# Altium PCB cpuPCB-v6.PcbDoc (part 1 of 3)
Units mil, origin at the board's own origin, x right, y up, seen from the top; angles counter-clockwise.
Board outline 3900 x 3900 mil, 2 copper layers (Top Layer, Bottom Layer); 139 components, 120 nets, 548 pads, 249 vias.
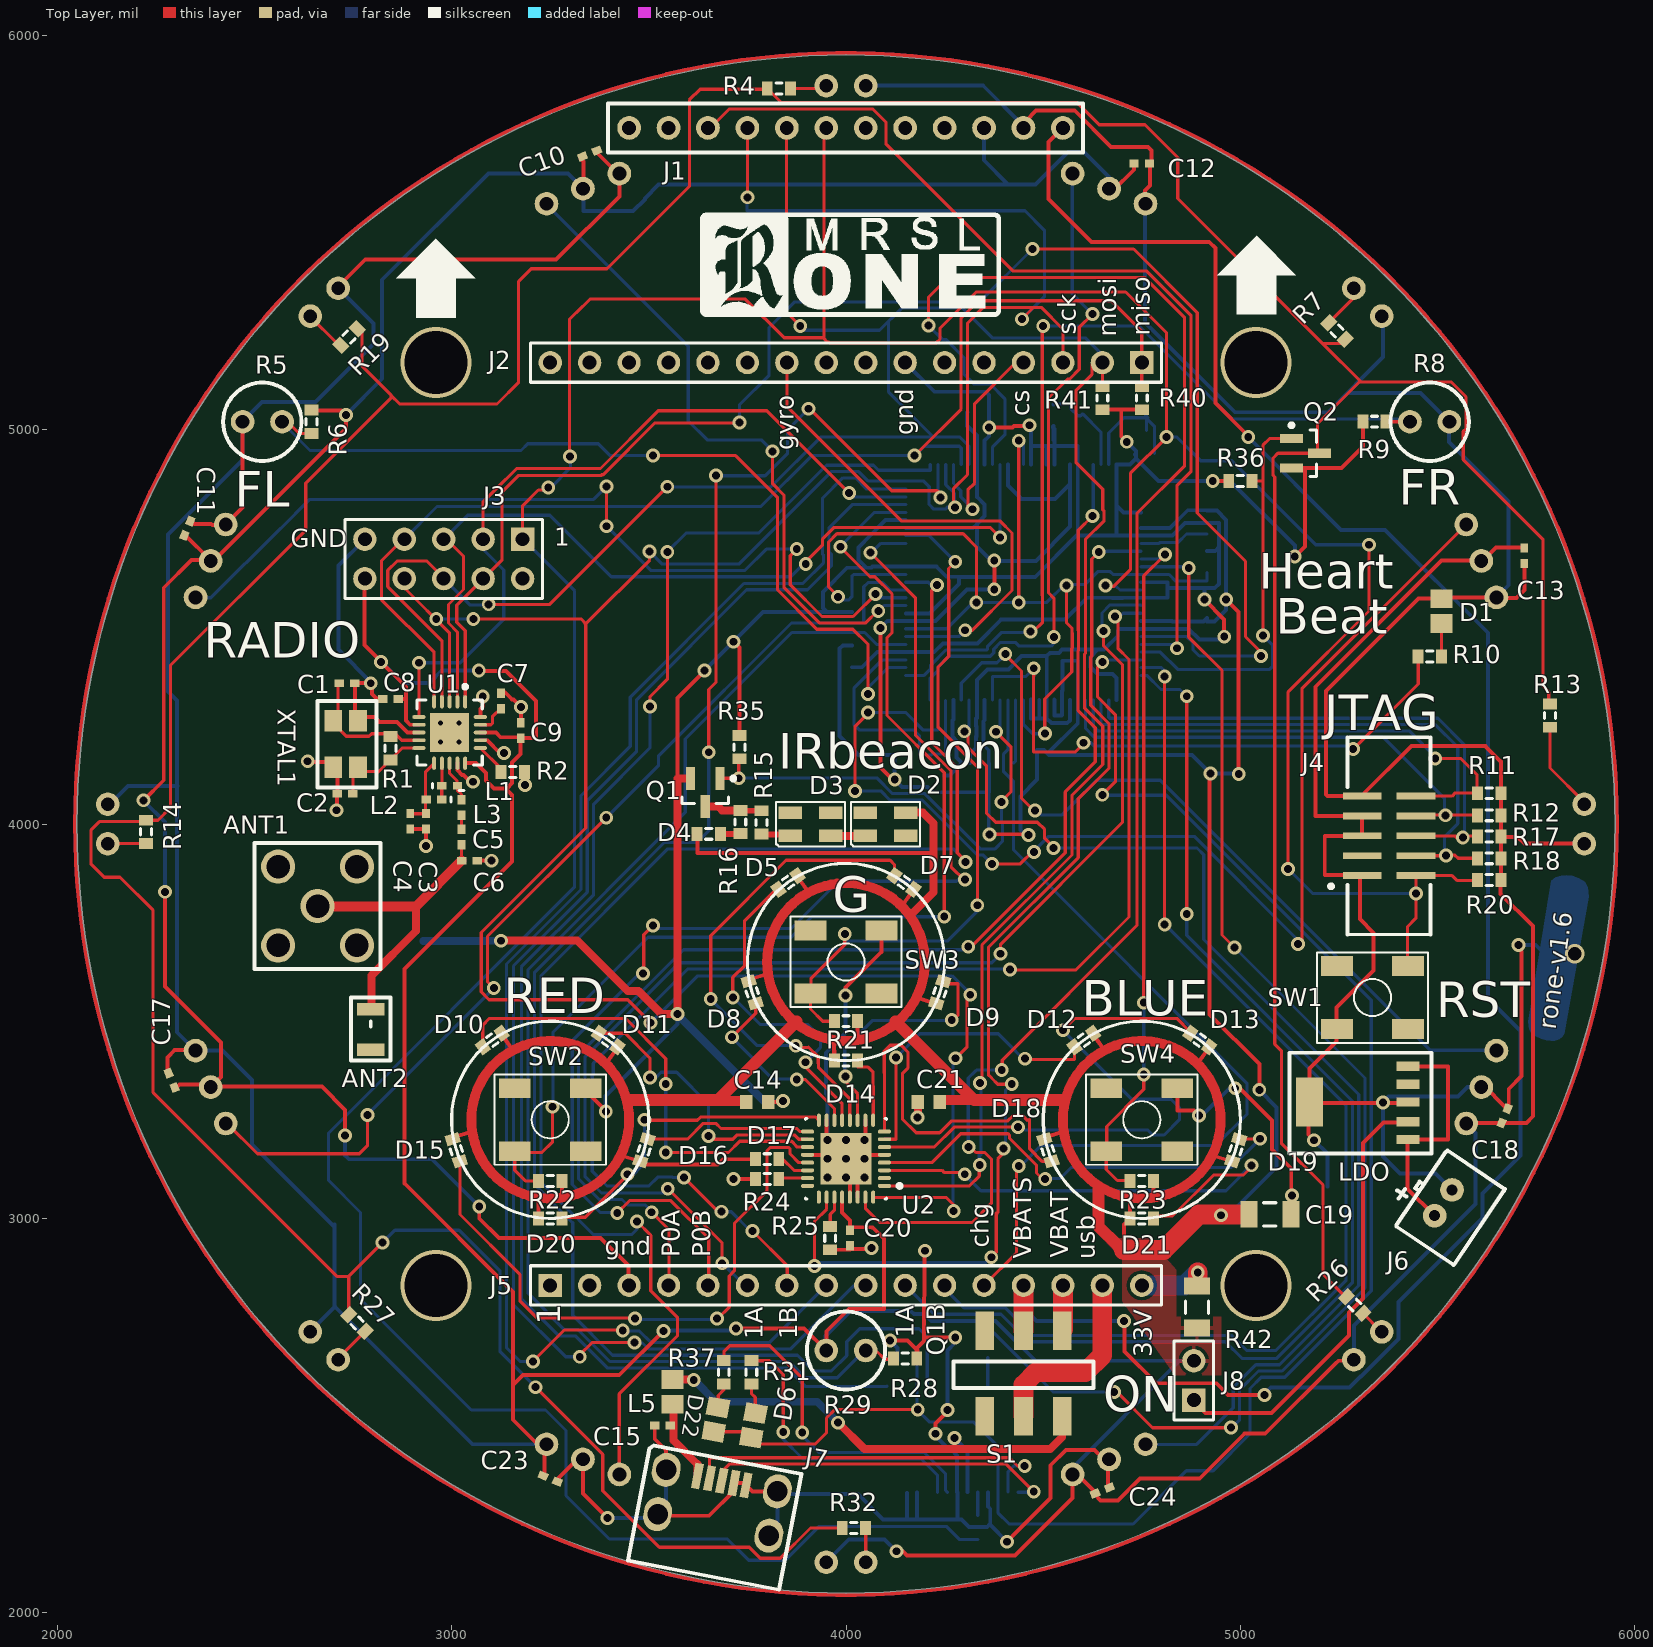
[diagram p0: Top Layer view]
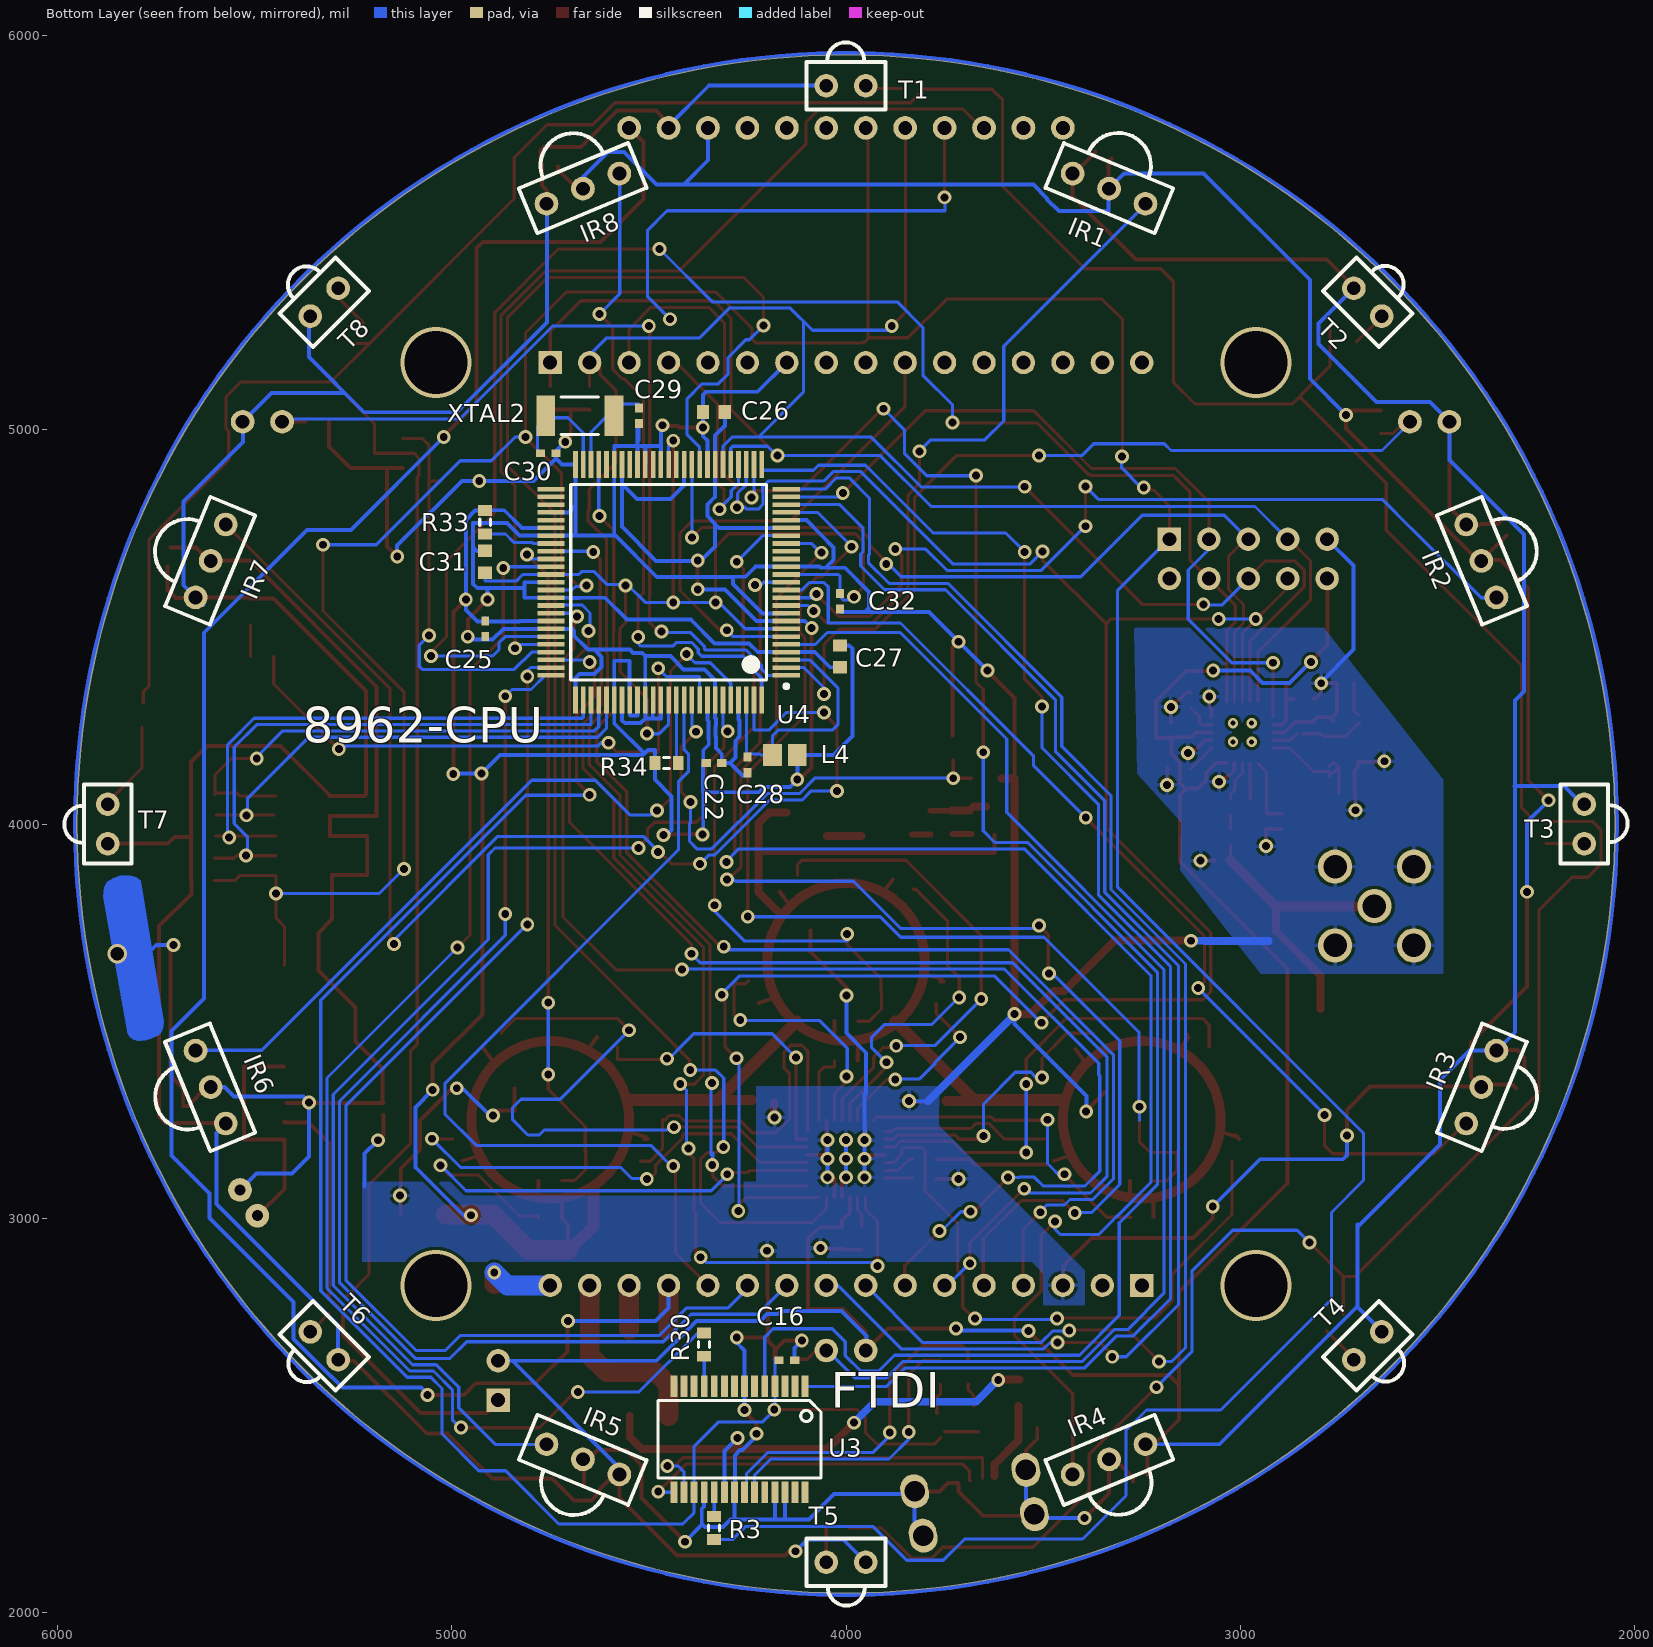
[diagram p1: Bottom Layer view, seen from below]

## Layer stack, top to bottom
Top Layer: signal copper 1.4
Dielectric: dielectric 12.6, FR-4, Dk 4.8
Bottom Layer: signal copper 1.4

## Board outline
4000,2050 cw(c4000,4000) 2050,4000 cw(c4000,4000) 4000,5950 cw(c4000,4000) 5950,4000 cw(c4000,4000)

## Design rules (kind name [scope] priority, off if disabled: settings)
Clearance [All] p1: gap=8
PolygonConnect [All] p1: connectstyle=Relief reliefconductorwidth=10 reliefentries=4 polygonreliefangle="90 Angle"
RoomDefinition USB_Headers [InComponentClass('USB_Headers')] p1: confinementstyle=ConfineIn formatcopy=TRUE lockcomponents=FALSE outline 0,0 2000,0 2000,1000 0,1000
RoomDefinition Radio [InComponentClass('Radio')] p2: confinementstyle=ConfineIn formatcopy=TRUE lockcomponents=FALSE outline 0,0 2000,0 2000,1000 0,1000
RoomDefinition LightSensors_Buttons_LCD [InComponentClass('LightSensors_Buttons_LCD')] p3: confinementstyle=ConfineIn formatcopy=TRUE lockcomponents=FALSE outline 0,0 2000,0 2000,1000 0,1000
RoomDefinition LEDs [InComponentClass('LEDs')] p4: confinementstyle=ConfineIn formatcopy=TRUE lockcomponents=FALSE outline 0,0 2000,0 2000,1000 0,1000
RoomDefinition IRComms [InComponentClass('IRComms')] p5: confinementstyle=ConfineIn formatcopy=TRUE lockcomponents=FALSE outline 0,0 2000,0 2000,1000 0,1000
RoomDefinition CPU [InComponentClass('CPU')] p6: confinementstyle=ConfineIn formatcopy=TRUE lockcomponents=FALSE outline 0,0 2000,0 2000,1000 0,1000
RoutingVias [All] p1: holewidth=20 width=35 viastyle="Through Hole" minholewidth=20 minwidth=35 maxholewidth=20 maxwidth=35
SMDNeckDown [All] p1: percent=400.000
SilkscreenOverComponentPads [All] p1: minsilkscreentomaskgap=10
SolderMaskExpansion [All] p1: expansion=4
Width "Schematic Width Constraint_9" [InNet('5VUSB')] p1: maxlimit=20 minlimit=10 preferedwidth=10 minimp=50.000000 maximp=50.000000 favimp=50.000000
Width "Schematic Width Constraint_5" [InNet('NetC15_2')] p2: maxlimit=20 minlimit=10 preferedwidth=10 minimp=50.000000 maximp=50.000000 favimp=50.000000
Width "Schematic Width Constraint_8" [InNet('GND')] p3: maxlimit=20 minlimit=10 preferedwidth=10 minimp=50.000000 maximp=50.000000 favimp=50.000000
Width "Schematic Width Constraint_2" [InNet('NetJ6_1')] p4: maxlimit=10 minlimit=10 preferedwidth=10
Width "Schematic Width Constraint_1" [InNet('3.3V_LDO')] p5: maxlimit=10 minlimit=10 preferedwidth=10
Width "Schematic Width Constraint_3" [InNet('3.3V_PS')] p6: maxlimit=20 minlimit=10 preferedwidth=10 minimp=50.000000 maximp=50.000000 favimp=50.000000
Width "Schematic Width Constraint_7" [InNet('VBAT_SW')] p7: maxlimit=20 minlimit=10 preferedwidth=10 minimp=50.000000 maximp=50.000000 favimp=50.000000
Width "Schematic Width Constraint_6" [InNet('5VUSB_SW')] p8: maxlimit=20 minlimit=10 preferedwidth=10 minimp=50.000000 maximp=50.000000 favimp=50.000000
Width "Schematic Width Constraint_4" [InNet('VBAT')] p9: maxlimit=20 minlimit=10 preferedwidth=10 minimp=50.000000 maximp=50.000000 favimp=50.000000
Width "Schematic Width Constraint" [InNet('3.3V')] p10: maxlimit=20 minlimit=10 preferedwidth=10 minimp=50.000000 maximp=50.000000 favimp=50.000000
Width [All] p11: maxlimit=8 minlimit=8 preferedwidth=8
27 further rules are at their usual default settings.

## Classes and differential pairs
component class LightSensors_Buttons_LCD: J1 R5 R6 R8 R9 R21 R22 R23 R28 R29 SW2 SW3 SW4
component class IRComms: C10 C11 C12 C13 C17 C18 C23 C24 D2 D3 D4 IR1 IR2 IR3 IR4 IR5 IR6 IR7 IR8 Q1 Q2 R4 R7 R13 R14 R15 R16 R19 R26 R27 R32 R35 R36 T1 T2 T3 T4 T5 T6 T7 T8 U6 U7 U9 U10
component class CPU: C22 C25 C26 C27 C28 C29 C30 C31 C32 D1 D? I2C IR_BEACON J4 L4 "LED1 Power" "LED2 USB" "LED-H Blinky" LEDs R10 R11 R12 R17 R18 R20 R33 R34 R40 R41 RST SPI SW1 SW? SW_RED U0 U4 XTAL2 "XTAL 1"
component class USB_Headers: C15 C16 C19 D6 D22 H0 H1 HCOMM HMOTOR J2 J5 J6 J7 J8 L5 LDO LED3 R3 R30 R31 R37 R42 S1 U3
component class LEDs: C14 C20 C21 D5 D7 D8 D9 D10 D11 D12 D13 D14 D15 D16 D17 D18 D19 D20 D21 R24 R25 TP? U2
component class Radio: ANT1 Ant1 ANT2 C1 C2 C3 C4 C5 C6 C7 C8 C9 C? J3 L1 L2 L3 R1 R2 U1 XTAL1

## Components (designator, comment, footprint, x,y, rotation, side; value= is the part's Value field where it differs from the comment)
ANT1 "Ant" AntennaSMA 2660,3792 r0 top
ANT2 "Antenna" antenna 2795,3530 r0 top
C1 "Cap Semi" CAPC1005L 2735,4357 r180 top
C2 "Cap Semi" CAPC1005L 2730,4077 r0 top
C3 "Cap Semi" CAPC1005L 2935,4007 r90 top
C4 "Cap Semi" CAPC1005L 2895,4007 r90 top
C5 "Cap Semi" CAPC1005L 3025,3967 r90 top
C6 "Cap Semi" CAPC1005L 3045,3907 r180 top
C7 "Cap Semi" CAPC1005L 3125,4312 r270 top
C8 "Cap Semi" CAPC1005L 2845,4317 r0 top
C9 "Cap Semi" CAPC1005L 3175,4237 r270 top
C10 "Cap Semi" CAPC1005L 3350,5700 r22.5 top
C11 "Cap Semi" CAPC1005L 2330,4750 r67.5 top
C12 "Cap Semi" CAPC1005L 4750,5675 r0 top
C13 "Cap Semi" CAPC1005L 5720,4680 r270 top
C14 "Cap Semi" CAPC1608L 3775,3295 r180 top
C15 "" CAPC1005L 3535,2475 r0 top
C16 "" CAPC1005L 4150,2640 r0 bottom
C17 "Cap Semi" CAPC1005L 2290,3350 r112.5 top
C18 "Cap Semi" CAPC1005L 5670,3260 r247.5 top
C19 "Cap Pol3" CAPC3216L 5075,3010 r0 top
C20 "Cap Semi" CAPC1005L 4010,2950 r90 top
C21 "Cap Semi" CAPC1608L 4210,3295 r0 top
C22 "Cap Semi" CAPC1005L 4335,4155 r0 bottom
C23 "Cap Semi" CAPC1005L 3250,2340 r157.5 top
C24 "Cap Semi" CAPC1005L 4650,2310 r202.5 top
C25 "Cap Semi" CAPC1005L 4915,4495 r90 bottom
C26 "Cap Semi" CAPC1608L 4335,5045 r180 bottom
C27 "Cap Semi" CAPC1608L 4015,4425 r90 bottom
C28 "Cap Semi" CAPC1005L 4250,4150 r90 bottom
C29 "Cap Semi" CAPC1005L 4525,5035 r90 bottom
C30 "Cap Semi" CAPC1005L 4755,4940 r0 bottom
C31 "Cap Semi" CAPC1608L 4915,4665 r270 bottom
C32 "Cap Semi" CAPC1005L 4015,4565 r90 bottom
D1 "heartbeat(white)" INDC2012L 5510,4540 r270 top
D2 "IRBeacon" IRBeacon 4100,4000 r270 top
D3 "IRBeacon" IRBeacon 3910,4000 r270 top
D4 "BEACON_PILOT" SurfaceMount(603) 3652,3975 r0 top
D5 "green" SurfaceMount(603) 3853,3852 r216 top
D6 "TXLED" INDC2012L 3765,2475 r80 top
D7 "green" SurfaceMount(603) 4147,3852 r144 top
D8 "green" SurfaceMount(603) 3762,3573 r288 top
D9 "green" SurfaceMount(603) 4238,3573 r72 top
D10 "red" SurfaceMount(603) 3103,3452 r216 top
D11 "red" SurfaceMount(603) 3397,3452 r144 top
D12 "blue" SurfaceMount(603) 4603,3452 r216 top
D13 "blue" SurfaceMount(603) 4897,3452 r144 top
D14 "green" SurfaceMount(603) 4000,3400 r0 top
D15 "red" SurfaceMount(603) 3012,3173 r288 top
D16 "red" SurfaceMount(603) 3488,3173 r72 top
D17 "extra" SurfaceMount(603) 3800,3150 r0 top
D18 "blue" SurfaceMount(603) 4512,3173 r288 top
D19 "blue" SurfaceMount(603) 4988,3173 r72 top
D20 "red" SurfaceMount(603) 3250,3000 r0 top
D21 "blue" SurfaceMount(603) 4750,3000 r0 top
D22 "RXLED" INDC2012L 3670,2490 r80 top
IR1 "GP1UX31QS" GP1UX31QS 3333,5611 r292.5 bottom locked
IR2 "GP1UX31QS" GP1UX31QS 2389,4667 r337.5 bottom locked
IR3 "GP1UX31QS" GP1UX31QS 2389,3333 r22.5 bottom locked
IR4 "GP1UX31QS" GP1UX31QS 3333,2389 r67.5 bottom locked
IR5 "GP1UX31QS" GP1UX31QS 4667,2389 r112.5 bottom locked
IR6 "GP1UX31QS" GP1UX31QS 5611,3333 r157.5 bottom locked
IR7 "GP1UX31QS" GP1UX31QS 5611,4667 r202.5 bottom locked
IR8 "GP1UX31QS" GP1UX31QS 4667,5611 r247.5 bottom locked
J1 "LCD" LCD-6100breakout 3950,5765 r270 top locked
J2 "HCOMM" HDR1X16 4750,5170 r180 top locked
J3 "radio_debug" HDR2X5 3180,4722 r180 top
J4 "JTAG" JTAG-10 5377,3970 r270 top
J5 "HMOT" HDR1X16 3250,2830 r0 top locked
J6 "Bat" BatteryConnJST 5515,3040 r56 top
J7 "USB" "USB Minib (thru-hole)" 3685,2335 r79.1 top
J8 "Header 2" HDR1X2 4882,2539 r90 top
L1 "Inductor" INDC1005AL 2995,4097 r0 top
L2 "Inductor" INDC1005AL 2955,4062 r180 top
L3 "Inductor" INDC1005AL 3025,4042 r270 top
L4 "Inductor" INDC2012L 4155,4175 r180 bottom
L5 "Inductor" INDC2012L 3560,2560 r90 top
LDO "TPS73733" SOT-223-5pin 5425,3295 r90 top
Q1 "Mosfet" SOT-23 3643,4080 r270 top
Q2 "Mosfet" SOT-23 5165,4940 r0 top
R1 "Res3" RESC1608L 2845,4192 r270 top
R2 "Res3" RESC1608L 3155,4132 r180 top
R3 "" RESC1608L 4335,2215 r270 bottom
R4 "Res3" RESC1608L 3830,5865 r180 top
R5 "photoresistor" photoresistor 2520,5020 r270 top locked
R6 "Res3" RESC1608L 2645,5020 r90 top
R7 "Res3" RESC1608L 5245,5250 r315 top
R8 "photoresistor" photoresistor 5480,5020 r90 top locked
R9 "Res3" RESC1608L 5340,5020 r180 top
R10 "Res3" RESC1608L 5480,4425 r180 top
R11 "Res3" RESC1608L 5631,4078 r0 top
R12 "Res3" RESC1608L 5631.21,4022 r0 top
R13 "Res3" RESC1608L 5785,4275 r90 top
R14 "Res3" RESC1608L 2225,3980 r90 top
R15 "Res3" RESC1608L 3786,4004 r270 top
R16 "Res3" RESC1608L 3732,4005 r270 top
R17 "Res3" RESC1608L 5631,3968 r0 top
R18 "Res3" RESC1608L 5631,3913 r0 top
R19 "Res3" RESC1608L 2740,5235 r45 top
R20 "Res3" RESC1608L 5631,3858 r0 top
R21 "Res3" RESC1608L 4000,3500 r0 top
R22 "Res3" RESC1608L 3250,3095 r0 top
R23 "Res3" RESC1608L 4750,3095 r0 top
R24 "Res3" RESC1608L 3800,3100 r180 top
R25 "Res3" RESC1608L 3960,2950 r90 top
R26 "Res3" RESC1608L 5290,2780 r135 top
R27 "Res3" RESC1608L 2760,2735 r135 top
R28 "Res3" RESC1608L 4150,2645 r0 top
R29 "photoresistor" photoresistor 4000,2665 r270 top locked
R30 "" RESC1608L 4360,2680 r90 bottom
R31 "" RESC1608L 3760,2610 r270 top
R32 "Res3" RESC1608L 4020,2215 r180 top
R33 "Res3" RESC1608L 4915,4765 r90 bottom
R34 "Res3" RESC1608L 4455,4155 r180 bottom
R35 "Res3" RESC1608L 3730,4195 r270 top
R36 "Res3" RESC1608L 5000,4870 r0 top
R37 "" RESC1608L 3690,2610 r270 top
R40 "Res3" RESC1608L 4750,5080 r90 top
R41 "Res3" RESC1608L 4650,5080 r90 top
R42 "" RESC3216L 4890,2775 r270 top
S1 "Power Switch" DPDTSwitch 4450,2715 r0 top
SW1 "Reset" SwitchTall-TL330 5335,3560 r180 top
SW2 "SW_RED" SwitchTall-TL330 3250,3250 r0 top locked
SW3 "SW_GREEN" SwitchTall-TL330 4000,3650 r0 top locked
SW4 "SW_BLUE" SwitchTall-TL330 4750,3250 r0 top locked
T1 "LN54" LN54 4000,5872 r270 bottom locked
T2 "LN54" LN54 2677,5323 r315 bottom locked
T3 "LN54" LN54 2128,4000 r0 bottom locked
T4 "LN54" LN54 2677,2677 r45 bottom locked
T5 "LN54" LN54 4000,2128 r90 bottom locked
T6 "LN54" LN54 5323,2677 r135 bottom locked
T7 "LN54" LN54 5872,4000 r180 bottom locked
T8 "LN54" LN54 5323,5323 r225 bottom locked
U1 "nRF24L01P" QFN-20 2995,4232 r270 top
U2 "Allegro6285" QFN-32 4000,3151.3 r180 top
U3 "FT232RL" SSOP-28 4270,2440 r0 bottom locked
U4 "LM3S8962" LQFP-100 4449.79,4613 r0 bottom locked
XTAL1 "RADIO CRYSTAL" RadioCrystal 2700,4262 r270 top
XTAL2 "8 MHz" RESC5025L 4675,5035 r0 bottom

## Footprints (in the part's own frame and the unit in brackets; to place one, negate y for a bottom-side part, rotate by r counter-clockwise, add the part's x,y. Pads: shape width x height; smd on the part's side, far side on the other; paste and mask are expansions set on the pad)
antenna [mm] "Radio Antenna"
  rect 1.8x0.8 smd: 1(0,0) 2(0,-2.6)
  silkscreen extent -1.27,-3.3 1.27,0.76
AntennaSMA [mm] "antenna for radios , tyco 108-11200"
  round 2.2 hole 1.511: 1(0,0) 2(-2.54,2.54) 3(2.54,2.54) 4(2.54,-2.54) 5(-2.54,-2.54)
  silkscreen extent -4.06,-4.06 4.06,4.06
BatteryConnJST [mil] "Connector for Battery"
  round 60 hole 28: 1(-40,0) 2(38.74,0)
  silkscreen extent -117,-110 116,115
CAPC1005L [mm] "Chip Capacitor, Body 1.0x0.5mm, IPC High Density"
  rect 0.6x0.5 smd: 1(-0.5,0) 2(0.5,0)
  body extent -0.55,-0.3 0.55,0.3, height 1.3
CAPC1608L [mm] "Chip Capacitor, Body 1.6x0.8mm, IPC High Density"
  rect 0.8x0.9 smd: 1(-0.7,0) 2(0.7,0)
  body extent -0.87,-0.48 0.87,0.48, height 1.3
CAPC3216L [mm] "Chip Capacitor, Body 3.2x1.6mm, IPC High Density"
  rect 1.1x1.7 smd: 1(-1.35,0) 2(1.35,0)
  silkscreen extent -0.4,-0.75 0.4,0.75, body extent -1.7,-0.9 1.7,0.9, height 1.3
DPDTSwitch [mm] "surface mount DPDT switch"
  rect 1.2x2.5 smd: 1(-2.5,-5.5) 2(0,-5.5) 3(2.5,-5.5) 4(-2.5,0) 5(0,0) 6(2.5,0)
  silkscreen extent -4.5,-3.68 4.5,-1.98
GP1UX31QS [mil]
  round 60 hole 35: 1(0,100) 2(0,0) 3(0,-100)
  silkscreen extent -146,-150 60,150
HDR1X2 [mm] "Connector; Header; 2 Position"
  rect 1.5x1.5 hole 0.9: 1(0,0)
  round 1.5 hole 0.9: 2(2.54,0)
  silkscreen extent -1.27,-1.27 3.81,1.27
HDR1X16 [mm] "Connector; Header; 16 Position"
  rect 1.5x1.5 hole 0.9: 1(0,0)
  round 1.5 hole 0.9: 2(2.54,0) 3(5.08,0) 4(7.62,0) 5(10.16,0) 6(12.7,0) 7(15.24,0) 8(17.78,0) 9(20.32,0) 10(22.86,0) 11(25.4,0) 12(27.94,0) 13(30.48,0) 14(33.02,0) 15(35.56,0) 16(38.1,0)
  silkscreen extent -1.27,-1.27 39.37,1.27
HDR2X5 [mm] "Connector; Header; 5x2 Position"
  rect 1.5x1.5 hole 0.9: 1(0,0)
  round 1.5 hole 0.9: 2(0,2.54) 3(2.54,0) 4(2.54,2.54) 5(5.08,0) 6(5.08,2.54) 7(7.62,0) 8(7.62,2.54) 9(10.16,0) 10(10.16,2.54)
  silkscreen extent -1.27,-1.27 11.43,3.81
INDC1005AL [mm] "Chip Inductor, Body 1.0x0.5mm, IPC High Density"
  rect 0.6x0.5 smd: 1(-0.5,0) 2(0.5,0)
  silkscreen extent -1.1,-0.15 -1.1,0.15, body extent -0.55,-0.3 0.55,0.3, height 0.55
INDC2012L [mm] "Chip Inductor, Body 2.0x1.2mm, IPC High Density"
  rect 1.2x1.4 smd: 1(-0.8,0) 2(0.8,0)
  body extent -1.1,-0.7 1.1,0.7, height 0.55
IRBeacon [mm]
  rect 0.8x1.5 smd: 1(-0.738,1.3) 2(0.762,1.3) 3(-0.738,-1.3) 4(0.762,-1.3)
  silkscreen extent -1.42,-2.21 1.46,2.24
JTAG-10 [mm] "Connector, Socket Strip, Double Row, SMT, 20 Position, Vertical, Pitch 2mm, Body 20 x 4 mm (LxW)"
  rect 0.44x2.5 smd: 1(-2.56,-1.73) 2(-2.56,1.73) 3(-1.28,-1.73) 4(-1.28,1.73) 5(0,-1.73) 6(0,1.73) 7(1.28,-1.73) 8(1.28,1.73) 9(2.56,-1.73) 10(2.56,1.73)
  silkscreen extent -6.35,-3.86 6.35,2.67, body extent -6.35,-2.01 6.35,2.03, height 3.56
LCD-6100breakout [mil]
  round 60 hole 35: 1(0,-500) 2(0,-400) 3(0,-300) 4(0,-200) 5(0,-100) 6(0,0) 7(0,100) 8(0,200) 9(0,300) 10(0,400) 11(0,500) 12(0,600)
  silkscreen extent -62,-553 62,651
LN54 [mil]
  round 60 hole 35: 1(0,50) 2(0,-50)
  silkscreen extent -110,-100 60,100
LQFP-100 [mm] "100-Pin LQFP Package"
  rect 1.75x0.3 smd: 1(-7.575,6) 2(-7.575,5.5) 3(-7.575,5) 4(-7.575,4.5) 5(-7.575,4) 6(-7.575,3.5) 7(-7.575,3) 8(-7.575,2.5) 9(-7.575,2) 10(-7.575,1.5) 11(-7.575,1) 12(-7.575,0.5) 13(-7.575,0) 14(-7.575,-0.5) 15(-7.575,-1) 16(-7.575,-1.5) 17(-7.575,-2) 18(-7.575,-2.5) 19(-7.575,-3) 20(-7.575,-3.5) 21(-7.575,-4) 22(-7.575,-4.5) 23(-7.575,-5) 24(-7.575,-5.5) 25(-7.575,-6) 51(7.575,-6) 52(7.575,-5.5) 53(7.575,-5) 54(7.575,-4.5) 55(7.575,-4) 56(7.575,-3.5) 57(7.575,-3) 58(7.575,-2.5) 59(7.575,-2) 60(7.575,-1.5) 61(7.575,-1) 62(7.575,-0.5) 63(7.575,0) 64(7.575,0.5) 65(7.575,1) 66(7.575,1.5) 67(7.575,2) 68(7.575,2.5) 69(7.575,3) 70(7.575,3.5) 71(7.575,4) 72(7.575,4.5) 73(7.575,5) 74(7.575,5.5) 75(7.575,6)
  rect 0.3x1.75 smd: 26(-6,-7.575) 27(-5.5,-7.575) 28(-5,-7.575) 29(-4.5,-7.575) 30(-4,-7.575) 31(-3.5,-7.575) 32(-3,-7.575) 33(-2.5,-7.575) 34(-2,-7.575) 35(-1.5,-7.575) 36(-1,-7.575) 37(-0.5,-7.575) 38(0,-7.575) 39(0.5,-7.575) 40(1,-7.575) 41(1.5,-7.575) 42(2,-7.575) 43(2.5,-7.575) 44(3,-7.575) 45(3.5,-7.575) 46(4,-7.575) 47(4.5,-7.575) 48(5,-7.575) 49(5.5,-7.575) 50(6,-7.575) 76(6,7.575) 77(5.5,7.575) 78(5,7.575) 79(4.5,7.575) 80(4,7.575) 81(3.5,7.575) 82(3,7.575) 83(2.5,7.575) 84(2,7.575) 85(1.5,7.575) 86(1,7.575) 87(0.5,7.575) 88(0,7.575) 89(-0.5,7.575) 90(-1,7.575) 91(-1.5,7.575) 92(-2,7.575) 93(-2.5,7.575) 94(-3,7.575) 95(-3.5,7.575) 96(-4,7.575) 97(-4.5,7.575) 98(-5,7.575) 99(-5.5,7.575) 100(-6,7.575)
  silkscreen extent -7.7,-6.3 6.3,6.82, body extent -7,-7 7,7, height 1.6
photoresistor [mil]
  round 60 hole 35: 1(0,50) 2(0,-50)
  silkscreen extent -99,-99 99,99
QFN-20 [mm] "QFN, 20-Leads, Body 4.2x4.2mm (max), Pitch 0.50mm, IPC Medium Density"
  oval 0.85x0.25 smd: 1(-1.975,1) 2(-1.975,0.5) 3(-1.975,0) 4(-1.975,-0.5) 5(-1.975,-1) 11(1.975,-1) 12(1.975,-0.5) 13(1.975,0) 14(1.975,0.5) 15(1.975,1)
  oval 0.25x0.85 smd: 6(-1,-1.975) 7(-0.5,-1.975) 8(0,-1.975) 9(0.5,-1.975) 10(1,-1.975) 16(1,1.975) 17(0.5,1.975) 18(0,1.975) 19(-0.5,1.975) 20(-1,1.975)
  rect 2.5x2.5 smd: 21(0,0)
  silkscreen extent -3.07,-2.1 2.1,2.1, body extent -2.07,-2.07 2.07,2.07, height 0.8
QFN-32 [mm] "QFN, 32-Leads, Body 5.2x5.2mm (max), Pitch 0.50mm, IPC Medium Density"
  oval 0.85x0.25 smd: 1(-2.475,1.75) 2(-2.475,1.25) 3(-2.475,0.75) 4(-2.475,0.25) 5(-2.475,-0.25) 6(-2.475,-0.75) 7(-2.475,-1.25) 8(-2.475,-1.75) 17(2.475,-1.75) 18(2.475,-1.25) 19(2.475,-0.75) 20(2.475,-0.25) 21(2.475,0.25) 22(2.475,0.75) 23(2.475,1.25) 24(2.475,1.75)
  oval 0.25x0.85 smd: 9(-1.75,-2.475) 10(-1.25,-2.475) 11(-0.75,-2.475) 12(-0.25,-2.475) 13(0.25,-2.475) 14(0.75,-2.475) 15(1.25,-2.475) 16(1.75,-2.475) 25(1.75,2.475) 26(1.25,2.475) 27(0.75,2.475) 28(0.25,2.475) 29(-0.25,2.475) 30(-0.75,2.475) 31(-1.25,2.475) 32(-1.75,2.475)
  rect 3.3x3.3 smd: 33(0,0)
  silkscreen extent -3.57,-2.6 2.6,2.6, body extent -2.57,-2.58 2.58,2.57, height 1
RadioCrystal [mm] "Crystal for radio"
  rect 1.4x1.15 smd: 1(0,0) 2(3,0) 3(3,1.6) 4(0,1.6)
  silkscreen extent -1.27,-1.02 4.32,2.79
RESC1608L [mm] "Chip Resistor, Body 1.6x0.8mm, IPC High Density"
  rect 0.7x0.9 smd: 1(-0.75,0) 2(0.75,0)
  silkscreen extent -0.2,-0.35 0.2,0.35, body extent -0.85,-0.48 0.85,0.48, height 0.9
RESC3216L [mm] "Chip Resistor, Body 3.1x1.6mm, IPC High Density"
  rect 1.1x1.7 smd: 1(-1.35,0) 2(1.35,0)
  silkscreen extent -0.4,-0.75 0.4,0.75, body extent -1.68,-0.87 1.68,0.87, height 2.54
RESC5025L [mm] "Chip Resistor, Body 5.0x2.5mm, IPC High Density"
  rect 1.2x2.6 smd: 1(-2.2,0) 2(2.2,0)
  silkscreen extent -1.2,-1.2 1.2,1.2, body extent -2.58,-1.33 2.58,1.33, height 0.9
SOT-23 [mm] "SOT23, 3-Leads, Body 3.0x2.5mm (max), Pitch 0.95mm, IPC Medium Density"
  rect 1.5x0.6 smd: 1(-0.9,0.95) 2(-0.9,-0.95) 3(0.9,0)
  silkscreen extent -1.02,-1.5 0.7,1.93, body extent -0.7,-1.5 0.7,1.5, height 1.2
SOT-223-5pin [mm] "sot223 tps73733"
  rect 0.6x1.5 smd: 1(-2.413,0) 2(-1.27,0) 3(0,0) 4(1.143,0) 5(2.3,0)
  rect 3.15x1.75 smd: 6(0,6.35)
  silkscreen extent -3.3,-1.52 3.17,7.65
SSOP-28 [mm]
  rect 0.44x1.37 smd: 1(-4.225,-3.415) 2(-3.575,-3.415) 3(-2.925,-3.415) 4(-2.275,-3.415) 5(-1.625,-3.415) 6(-0.975,-3.415) 7(-0.325,-3.415) 8(0.325,-3.415) 9(0.975,-3.415) 10(1.625,-3.415) 11(2.275,-3.415) 12(2.925,-3.415) 13(3.575,-3.415) 14(4.225,-3.415) 15(4.225,3.415) 16(3.575,3.415) 17(2.925,3.415) 18(2.275,3.415) 19(1.625,3.415) 20(0.975,3.415) 21(0.325,3.415) 22(-0.325,3.415) 23(-0.975,3.415) 24(-1.625,3.415) 25(-2.275,3.415) 26(-2.925,3.415) 27(-3.575,3.415) 28(-4.225,3.415)
  silkscreen extent -5.25,-2.5 5.25,2.5
SurfaceMount(603) [mm]
  rect 0.7x0.9 smd: 1(-0.75,0) 2(0.75,0)
  silkscreen extent -0.2,-0.35 0.2,0.35, body extent -0.85,-0.48 0.85,0.48, height 0.9
SwitchTall-TL330 [mil] "Small SMDTall Tact Switch E-Switch TL330"
  rect 80x50 smd: 1(-90,80) 2(90,80) 3(-90,-80) 4(90,-80)
  silkscreen extent -141,-114 141,115
"USB Minib (thru-hole)" [mm]
  rect 1.65x0.55 smd: 1(0,1.6) 2(0,0.8) 3(0,0) 4(0,-0.8) 5(0,-1.6)
  oval 2.2x1.8 hole 1.321: 6(0,3.65) 7(-2.9,3.65) 8(-2.9,-3.65) 9(0,-3.65)
  silkscreen extent -6.2,-4.95 1.39,4.95

## Part data
ANT1: library part AntennaConn
C1 C2 C3 C4 C5 C6 C7 C8 C9 C10 C11 C12 C13 C14 C17 C18 C20 C21 C22 C23 C24 C25 C26 C27 C28 C29 C30 C31 C32: "Capacitor (Semiconductor SIM Model)"
C15 C16: library part Cap, "Capacitor"
C19: "Polarized Capacitor (Surface Mount)"
D1 D6 D22: library part LED2, "Typical RED, GREEN, YELLOW, AMBER GaAs LED"
D4 D5 D7 D8 D9 D10 D11 D12 D13 D14 D15 D16 D17 D18 D19 D20 D21: library part LED
J1: library part LCD-NokiaBreakout
J2 J5: library part "Header 16", "Header, 16-Pin"
J3: library part "Header 5X2", "Header, 5-Pin, Dual row"
J4: library part "Header 5X2H", "Header, 5-Pin, Dual row, Right Angle"
J6: library part BatteryConnJST
J7: library part USB-ConnTH
J8: "Header, 2-Pin"
LDO: library part LDO33-TI-TPS73733
R1 R2 R4 R6 R7 R9 R10 R11 R12 R13 R14 R15 R16 R17 R18 R19 R20 R21 R22 R23 R24 R25 R26 R27 R28 R32 R33 R34 R35 R36 R40 R41: "Resistor"
R3 R30 R31 R37 R42: library part Res1, "Resistor"
S1: library part DPDTSwitch
SW1 SW2 SW3 SW4: library part Switch-TL330
U1: library part radio-nRF24L01P
XTAL1: library part RadioCrystal
XTAL2: library part XTAL, "Crystal Oscillator"

## Via types
v1: diameter 35, hole 20, Top Layer to Bottom Layer, 240 vias
v2: diameter 180, hole 160, Top Layer to Bottom Layer, 4 vias
v3: diameter 25.98, hole 12.99, Top Layer to Bottom Layer, tented top, 4 vias
v4: diameter 50, hole 35, Top Layer to Bottom Layer, 1 vias

## Nets (pads, with @x,y where several pads share a name; then routed paths per layer and width w, separated by ;. In a path a pad name is that pad's centre, name@x,y a point inside that pad or via, vN(x,y) a via of type N, cw(c..) or ccw(c..) an arc to the next point about the centre after c; other vN are vias at no path point)
3.3V: C8.2 C9.2 C10.2 C11.2 C12.2 C13.2 C14.2 C17.2 C18.2 C19.1 C20.2 C21.2 C22.2 C23.2 C24.2 C25.2 C26.2 C27.2 D1.1 D2.1 D4.1 D5.1 D7.1 D8.1 D9.1 D10.1 D11.1 D12.1 D13.1 D14.1 D15.1 D16.1 D17.1 D18.1 D19.1 D20.1 D21.1 IR1.3 IR2.3 IR3.3 IR4.3 IR5.3 IR6.3 IR7.3 IR8.3 J1.11 J3.10 J4.1 J8.2 L4.2 R5.2 R8.2 R11.2 R12.2 R17.2 R18.2 R20.2 R21.2 R22.2 R23.2 R29.2 R33.2 R34.1 R42.2 T1.2 T2.2 T3.2 T4.2 T5.2 T6.2 T7.2 T8.2 U1.7 U1.15 U1.18 U2.28 U4.8 U4.20 U4.32 U4.36 U4.44 U4.56 U4.68 U4.81 U4.83 U4.84 U4.93 | length 48666.3
  Top Layer w10: C17.2@2279.45,3375.46 2279.45,3408 2297.84,3426.39 IR3.3@2353.73,3426.39 ; C11.2@2340.55,4768.45 2348,4761 2390.46,4761 2393.07,4758.39 IR2.3@2430.27,4758.39 ; IR2.3@2427.27,4759.39 2470,4802.12 R5.2@2470,5021 ; T2.2@2710,5360 2781,5431 3265,5431 3425.39,5591.39 IR1.3@3425.39,5649.27 ; J3.10@2779,4623 2779,4454 v1@2822,4411 ; v1(2821,4411) 2884,4348 2884,4318 ; C8.2@2864.69,4317 2883,4317 2884,4318 ; U1.7@2917.24,4251.69 2894.32,4251.69 2884,4262 2884,4318 ; D15.1@3002.88,3201.08 D15.1@3013,3211.21 ; U1.15@3034.37,4154.24 3061.76,4154.24 3087,4129 3087,4110 3107,4090 3137,4090 ; v1(3069,4389) 3070,4388 3138,4388 3214,4312 3214,4218 3173,4218 C9.2@3172,4219 ; U1.18@3072.76,4232 3112,4232 3124,4220 3172,4220 C9.2@3174,4218 ; D10.1@3135,3455 D10.1@3135,3466.24 ; C9.2@3175,4219 3175,4177 3153.5,4155.5 3153.5,4103.5 3140,4090 3137,4090 ; 3220,3050 3220.47,3049.53 ; C23.2@3235.54,2349.55 IR4.3@3235.54,2407.54 ; IR4.3@3238,2427 3218.43,2427 3156,2489.43 3156,2577 ; 3279.53,3055.47 R22.2@3279.53,3095 ; C10.2@3368,5705 3368,5703 3424.73,5646.27 IR1.3@3426.39,5646.27 ; D16.1@3492.12,3137 3529.87,3137 3530.37,3136.5 3674.37,3136.5 3687.87,3150 D17.1@3770,3150 ; v1(3537,2714.5) 3425,2602.5 3181.5,2602.5 3156,2577 ; D4.1@3624,3972 3624,3927 4222,3927 ; 3662,3297 3664,3295 ; v1(3721,2721) 3894,2721 R29.2@3950,2665 3950,2713 4007,2770 4096,2770 4096,2948.56 4067,2977.56 ; D8.1@3752.87,3601.08 D8.1@3762,3601.08 ; D14.1@3970.47,3400 3970.47,3424 ; 3990.16,3015 U2.28@3990.16,3053.86 ; 3990.16,3015.16 3990,3015 4010,2995 4010,2977.56 4067,2977.56 ; 4029.53,3456.47 R21.2@4029.53,3500 ; 4066.44,2977 4067,2977.56 ; v1(4087,4497) 4087,4143 4120.25,4109.75 v1(4123.5,4113) ; v1@4122,4108 v1@4123,4109 ; v1(4128,2156) 4144,2156 4155,2145 4429,2145 4574.61,2290.61 4574.61,2363.39 4631.55,2306.45 4631.55,2299.45 4645.85,2285.15 4690.12,2285.15 4744.97,2340 4897,2340 5011,2454 5063,2454 5242,2633 5243,2633 5249,2639 T6.2@5289,2639 ; v1(4364,3973) 4365,3973 4367,3975 4368,3974 4474,3974 4472,3972 v1(4463,3972) ; v1(4376,4595) v1(4376,4668) ; J1.11@4456,5767 4456,5783 4482,5809 4580,5809 4672,5717 4766,5717 4775,5708 4775,5677.56 4771,5673.56 4771,5618.61 4758.39,5606 IR8.3@4758.39,5574.39 ; D18.1@4502.87,3201.08 D18.1@4512,3201.08 ; 4705,2920 4705,2984.53 D21.1@4720.47,3000 ; IR8.3@4758.39,5569.73 IR8.3@4758.39,5571 ; IR8.3@4761,5571 IR8.3@4758.39,5571 ; 4779.53,3054.47 R23.2@4779.53,3095 ; v1(4924,4128) 4922,4126 4922,3517 5048,3391 v1(5048,3326) v1@5048,3324 ; v1(4964,4569) 4995,4538 v1@4995,4138 ; J4.1@5309,4073 5434,4198 5622,4198 ; J4.1@5310,4071 5221,4071 5217,4075 5217,4337 5451.5,4571.5 D1.1@5510,4571.5 ; D1.1@5511,4574 5511.61,4574.61 IR7.3@5649.27,4574.61 ; IR6.3@5569.73,3241.61 5611,3241.61 5611.39,3242 5725,3242 5742,3259 5742,3741 5660,3823 R20.2@5660,3858 ; 5622,4197 5660,4159 5660.53,4159 R11.2@5660.53,4078 ; IR7.3@5646.27,4573.61 5700.16,4573.61 5710.55,4584 ; R17.2@5660,3967 R17.2@5660.53,3967 ; R20.2@5660.53,3858 R18.2@5660.53,3913 R17.2@5660.53,3967 ; R11.2@5660.53,4077.53 R17.2@5660.53,3968 R17.2@5660.53,3967 ; 5710,4583 5720,4593 C13.2@5720,4652.44 ; T7.2@5875,3950 5720,3950 5703,3967 R17.2@5660.53,3967 ; 3137,4090 3153,4074 3153,3905 2880,3632 2880,3089 3156,2813 3156,2577 ; IR8.3@4758.39,5571 IR8.3@4758.39,5574.39 ; IR8.3@4758.39,5571 4755,5571 IR8.3@4758.39,5574.39
  Top Layer w20: D2.1@4151.18,4029.06 4194.94,4029.06 4222,4002 4222,3927 4222,3827 4163,3768
  Top Layer w25: 3661.56,3298 C14.2@3745,3298 ; C21.2@4237.56,3300 4325,3300 ; 4550,3250 cw(c4750,3250) 4950,3250 ; 3050,3250 ccw(c3250,3250) 3450,3250 ; 3050,3250 ccw(c3250,3250) 3450,3250 ; 3050,3250 cw(c3250,3250) 3450,3250 ; 3050,3250 cw(c3250,3250) 3450,3250 ; 3450,3250 ccw(c3250,3250) 3450,3250 ; 3800,3650 cw(c4000,3650) 4200,3650 ; 3800,3650 cw(c4000,3650) 4200,3650 ; 3800,3650 ccw(c4000,3650) 4200,3650 ; 3800,3650 ccw(c4000,3650) 4200,3650 ; 3800,3650 ccw(c4000,3650) 4200,3650 ; 3800,3650 ccw(c4000,3650) 4200,3650 ; 3800,3650 ccw(c4000,3650) 4200,3650 ; 3800,3650 ccw(c4000,3650) 4200,3650 ; 3800,3650 ccw(c4000,3650) 4200,3650 ; 3800,3650 ccw(c4000,3650) 4200,3650 ; 3800,3650 ccw(c4000,3650) 4200,3650 ; 3800,3650 ccw(c4000,3650) 4200,3650 ; 3800,3650 ccw(c4000,3650) 4200,3650 ; 3800,3650 ccw(c4000,3650) 4200,3650 ; 3800,3650 ccw(c4000,3650) 4200,3650 ; 3800,3650 ccw(c4000,3650) 4200,3650 ; 4200,3650 ccw(c4000,3650) 4200,3650 ; 4200,3650 ccw(c4000,3650) 4200,3650 ; 4950,3250 ccw(c4750,3250) 4950,3250
  Top Layer w30: 3450,3300 3675,3300 3875,3500 ; 4125,3500 4325,3300 4550,3300 ; 4640,3075 4640,2980 4690,2930
  Top Layer w50: 4705,2920 4805,2920 4895,3010 C19.1@5015.2,3010
  Bottom Layer w10: T3.2@2132,4049 2179,4096 2305,4096 ; IR3.3@2353.73,3426.39 2349.61,3426.39 2304,3472 2304,4313 2281,4336 2281,4734 2469.5,4922.5 R5.2@2469.5,5020.5 ; IR3.3@2356,3426 2419,3426 2494,3351 2494,3187 2703,2978 ; R5.2@2484,5035 R5.2@2469.5,5020.5 ; T4.2@2642,2714 2703,2775 2703,2978 ; 2703,2776 2704,2776 3052.73,2427.27 IR4.3@3240.61,2427.27 ; 2703,2984 2703,2978 ; T2.2@2713,5360 2713,5357.71 2802,5268.71 2802,5217 2655,5070 2519,5070 R5.2@2469.5,5020.5 ; v1@2821,4412 2875,4358 2944,4358 2975,4389 v1(3069,4389) ; IR1.3@3426.39,5646.27 IR1.3@3426.39,5669.37 ; v1(3537,2714.5) 3538,2715.5 3715.5,2715.5 v1(3721,2721) ; R29.2@3948,2664 3948,2702 4011,2765 4164.04,2765 4172.04,2757 4199.96,2757 4216.96,2740 4379.41,2740 4390.72,2728.69 4390.72,2728.28 4480,2639 4846,2639 ; T5.2@3950,2129 4007,2186 4098,2186 v1(4128,2156) v1@4128,2167 ; C27.2@4015,4452.56 3992,4452.56 3984,4444.56 3984,4223 4032,4175 L4.2@4123.5,4175 v1(4123.5,4113) 4142.5,4094 4207.04,4094 4220.48,4080.56 4362,4080.56 ; T1.2@4050,5872 4348,5872 J1.11@4453,5767 ; v1(4087,4497) 4104.57,4514.57 U4.8@4151.56,4514.57 4226.57,4514.57 4307,4595 v1(4376,4595) ; U4.20@4151.56,4750.8 4322.47,4750.8 4331.68,4760 ; C26.2@4308,5044 4307,5043 4307,5009 4307.68,5009 4331.68,4985 U4.32@4331.68,4911.23 4331.68,4829.46 4332.63,4828.5 4333.63,4828.5 4351.5,4810.63 4351.5,4780.5 4331.68,4760.68 4331.68,4760 ; U4.93@4351.36,4314.77 4351.36,4263.1 4348,4259.74 4348,4255.59 4348.5,4255.09 4348.5,4214.91 4348,4214.41 4348,4201 4362,4187 C22.2@4362,4154 ; 4362,4122 4362,4080.56 ; C22.2@4362.56,4154 4362.56,4080.56 4362,4080.56 ; v1(4364,3973) 4365,3973 4367,3975 4362,3980 4362,4080.56 ; U4.36@4410.42,4911.23 4410.42,4858.58 4445,4824 4530,4824 4567.9,4861.9 ; v1(4463,3972) 4472,3972 4474,3974 4454,3974 4454,3973 4442,3985 4442,4070 4484.53,4112.53 R34.1@4484.53,4155 4484.53,4188 4501.58,4188 4511.08,4178.5 ; U4.84@4528,4316 4529,4315 4529,4275 4547,4275 4548.21,4276.21 U4.83@4548.21,4337.21 ; U4.83@4547,4336 U4.83@4548.21,4337.21 ; U4.83@4547.3,4296 U4.83@4548.21,4296 ; IR5.3@4565,2358 4571,2352 IR5.3@4574,2352 ; IR5.3@4566.17,2359.17 4846,2639 ; U4.44@4567.9,4911.23 4567.9,4753.8 4481.37,4667.27 4368.4,4667.27 4331.68,4704 4331.68,4760 ; U4.68@4748.01,4514.57 4827,4514.57 4827.57,4514 4906.44,4514 C25.2@4915,4522.56 ; U4.56@4748.01,4750.8 4821.8,4750.8 4866.5,4795.5 4914.5,4795.5 4915.47,4794.53 4940.22,4794.53 4963.72,4771.03 4963.72,4542.28 4934.44,4513 4915,4513 C25.2@4915,4523 ; IR8.3@4758.39,5573 4758.39,5271.61 4986,5044 5222,5044 5362,5184 5362,5283 T8.2@5358,5287 ; J8.2@4882,2639 4846,2639 ; v1(4951,3008) 4951,2995 4954,2998 4960,2998 4960,2999 4961,2999 5091,3129 5092,3129 5092,3281 v1@5048,3325 ; v1(4996,4127) 4996,4133 4995,4134 4995,4128 v1(4924,4128) 4877,4175 4514.58,4175 4511.08,4178.5 ; 5272,5093 5457,5093 R8.2@5510,5040 ; T6.2@5287.64,2641.64 5287.64,2728.64 5596,3037 5596,3217 IR6.3@5569,3244 ; R8.2@5529,5022 5529,4969 5680,4818 5680,4605.34 IR7.3@5649.27,4574.61 ; IR7.3@5629.66,4557 IR7.3@5646.27,4573.61 ; 4511.08,4178.5 4587.58,4255 U4.81@4587.58,4314.77 4587.58,4414 4549,4414 4549,4354.61 4548.99,4337.99 U4.83@4548.21,4337.21
3.3V_LDO: J8.1 LDO.2 | length 1129.7
  Top Layer w10: J8.1@4880,2538 4912,2506 5079,2506 5275.61,2702.61 5275.61,2761.72 5311,2797.11 5311,3191 5363,3243 5423,3243 LDO.2@5425,3245
3.3V_PS: J5.16 R42.1 | length 185.7
  Top Layer w50: R42.1@4892,2833 v1(4892,2863)
  Bottom Layer w50: J5.16@4750,2830 4859,2830 v1(4892,2863)
5VUSB: L5.2 S1.3 U3.20 | length 1303.2
  Top Layer w10: 4275,2418 v1(4275,2443)
  Top Layer w20: L5.2@3560,2591 3613,2591 v1(3614,2590) ; v1(3980,2482) 4047,2415 4518,2415 4548.43,2445.43 S1.3@4548.43,2498.46
  Bottom Layer w10: v1(4275,2443) 4308.39,2409.61 U3.20@4308.39,2305.55
  Bottom Layer w20: v1(3614,2590) 3615,2590 3670,2535 3927,2535 v1(3980,2482)
5VUSB_SW: J5.15 S1.2 | length 487.1
  Top Layer w50: S1.2@4450,2499 4450,2578 4482,2610 4607,2610 4650,2653 J5.15@4650,2830
CHRGEN: J5.12 U4.90 | length 2303.3
  Top Layer w8: J5.12@4350,2830 4432,2912 4432,3133 v1(4438,3133)
  Bottom Layer w8: U4.90@4410.42,4314.77 4410.42,4188.41 4399.69,4177.69 4399.69,4132.31 4425,4107.01 4425,3934 5016.5,3342.5 5016.5,3263.5 4938,3185 4495,3185 4437.5,3127.5 4432,3133 v1(4438,3133)
FTDI_3V3: C16.2 D6.1 D22.1 U3.4 U3.17 U4.73 | length 4496.2
  Top Layer w8: D22.1@3664.53,2458.98 D6.1@3750.02,2458.98 ; D6.1@3759.53,2443.98 3776.01,2427.5 3921.5,2427.5 3950.5,2456.5 3950.5,2494.22 3971.28,2515 v1(4182,2515) ; v1(4650,4074) 4683,4107 4683,4277 4638,4322 4638,4398 4650,4410 v1(4650,4411)
  Bottom Layer w8: v1@4180,2515 4211,2484 4323,2484 4385.16,2421.84 U3.17@4385.16,2305.55 ; C16.2@4180,2644 4180,2574.88 U3.4@4180.43,2574.45 4180.43,2517.57 v1@4181,2517 ; U3.17@4385,2306 4385,2254 4414,2225 4728,2225 4863,2360 4931,2360 5024.5,2453.5 5024.5,2568.5 5053,2597 5112.51,2597 5332,2816.49 5332,3553.37 4812.37,4073 4654,4073 v1@4651,4070 ; v1@4647,4410 4653.15,4416.15 U4.73@4748.01,4416.15
FTDI_RX: U3.1 U4.26 | length 3840.5
  Top Layer w8: v1@3503,4299 3503,4323 3547,4367 v1(3547,4690)
  Bottom Layer w8: v1(3503,4298) 3503,4193 3360,4050 3360,3820.63 3177,3637.63 3177,2797 3272,2702 3313.75,2702 3394.75,2621 3849.35,2621 3896.35,2574 4073.1,2574 ; v1(3547,4690) 3595,4738 3779,4738 3950.54,4909.54 4069.74,4909.54 4082.28,4897 4213.57,4897 U4.26@4213.57,4911.23 ; 4074,2574 4103.21,2574 U3.1@4103.66,2574.45
FTDI_TX: U3.5 U4.27 | length 4400
  Top Layer w8: v1(3652,4182) 3652,4341 3670.5,4359.5 v1@3670.5,4877.92 ; v1(3905,5053) 3908,5053 4116,4845 4231,4845 4240,4836 v1(4240,4828)
  Bottom Layer w8: 3307,2989.37 3307,2988.37 ; v1(3652,4182) 3652,3982.63 3622.37,3953 3539,3953 3210.5,3624.5 3210.5,3084.87 3307,2988.37 ; v1@3670,4883 3795,4883 3852,4940 3852,5000 v1(3905,5053) ; U3.5@4206.02,2574.45 4206.02,2698.98 4185,2720 4035,2720 4002,2687 4002,2652 3963,2613 3917,2613 3877,2653 3408,2653 3307,2754 3307,2988.37 ; 4232,4845 4233.25,4846.25 U4.27@4233.25,4911.23
  other v1: 3670,4884